# Altium PCB HLK-7621-ALL-KIT-V2.2.PcbDoc (part 2 of 2)
Units mm, origin at the board's own origin, x right, y up, seen from the top; angles counter-clockwise.
Board outline 140 x 100 mm, 2 copper layers (Top Layer, Bottom Layer); 118 components, 240 nets, 722 pads, 584 vias.
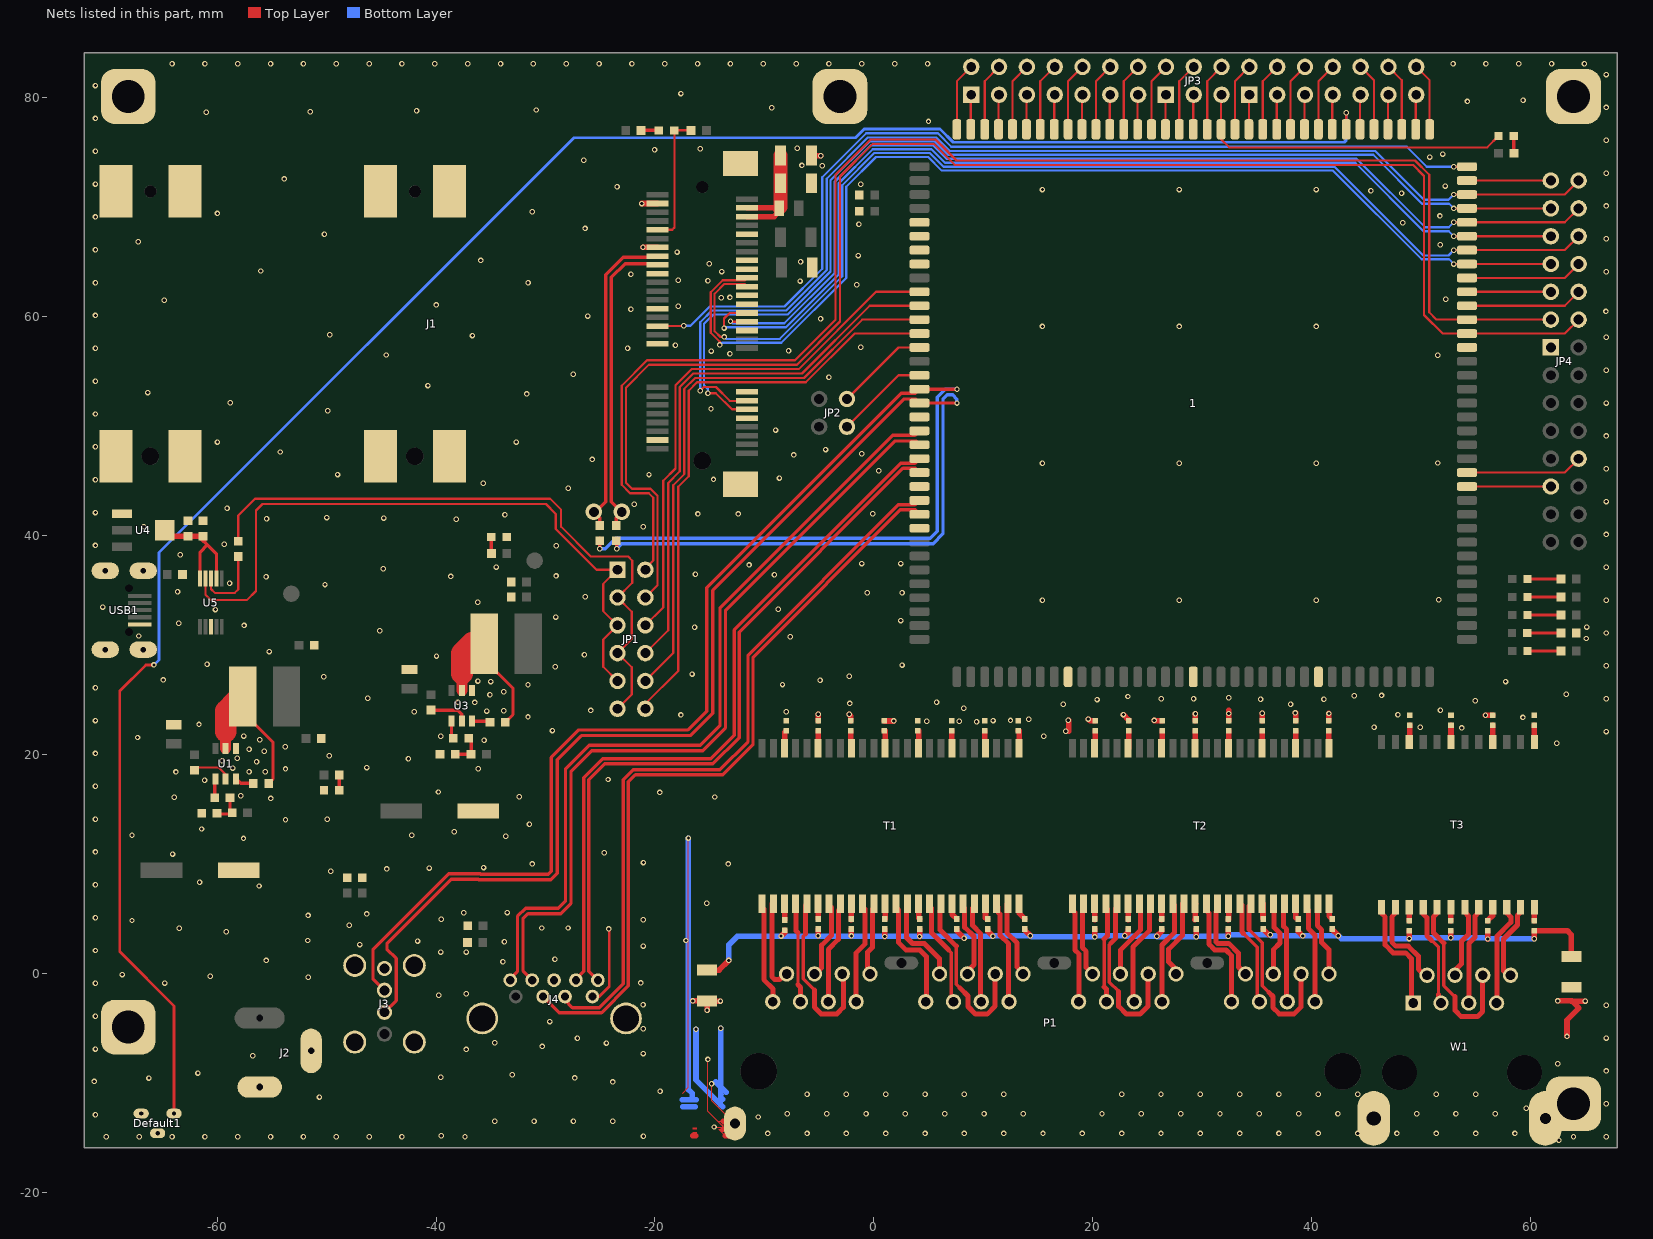
[diagram p2: the nets of this part, all layers, seen from the top]

## Via types
v1: diameter 0.5, hole 0.3, Top Layer to Bottom Layer, tented both sides, 582 vias
v2: diameter 1.5, hole 0.9, Top Layer to Bottom Layer, tented both sides, 2 vias

## Nets (pads, with @x,y where several pads share a name; then routed paths per layer and width w, separated by ;. In a path a pad name is that pad's centre, name@x,y a point inside that pad or via, vN(x,y) a via of type N, cw(c..) or ccw(c..) an arc to the next point about the centre after c; other vN are vias at no path point) (continued)
GND: 1.5 1.6 1.7 1.8 1.19 1.24 1.27 1.44 1.53 1.62 1.92 1.119 1.125 C4.2 C5.2 C7.2 C9.2 C10.2 C11.2 C12.2 C13.2 C14.2 C15.2 C18.2 C19.2 C20.2 C21.2 C22.2 C23.2 C24.2 C25.2 C26.2 C27.1 C28.1 C29.1 C30.1 C31.1 C32.1 C33.1 C34.1 C35.1 C36.1 C37.1 C38.1 C39.1 C40.1 C41.1 C42.1 C43.1 C44.1 C45.1 C46.1 C47.2 C48.2 C49.1 D6.2 D7.2 Default1.2 Default1.3 J1.4 J1.9 J1.15 J1.18 J1.21 J1.26 J1.27 J1.29 J1.34 J1.35 J1.37 J1.40 J1.43 J1.50 J1.55 J1.56 J1.57 J1.58 J1.59 J1.60 J1.63 J1.64 J1.65 J1.66 J2.2 J2.3 J3.4 J3.5 J3.6 J3.7 J3.8 J4.4 J4.7 J4.10 J4.11 JP3.15 JP3.21 JP4.13 pad.1@63.892,80.135 pad.1@63.892,-11.865 pad.1@-3.108,80.135 pad.1@-68.108,80.135 pad.1@-68.108,-4.865 pad.@-12.698,-13.667 R4.1 R11.1 R46.1 U1.1 U3.1 U4.1 U5.3 USB1.5 USB1.6 USB1.7 USB1.8 USB1.9 W1. W1.10 | length 126.3
  Top Layer w0.102: -17.482,-10.889 -16.942,-10.349 v1(-16.942,12.405) ; -16.563,-14.472 -16.163,-14.472 -16.163,-14.666 -16.279,-14.782 ; -16.563,-14.145 -16.163,-14.145 ; -16.563,-14.072 -16.163,-14.072 ; v1(-15.161,-7.813) -15.161,-12.563 pad.@-12.885,-14.84 ; v1(-14.834,-10.033) -14.834,-11.568 pad.@-12.938,-13.464 ; v1(-14.603,-13.985) -13.124,-13.985 pad.@-12.924,-14.185 ; -14.163,-13.464 -13.763,-13.464 -13.763,-14.185 ; -13.576,-14.771 -14.163,-14.185 ; -14.163,-14.185 -13.763,-14.185 ; -14.163,-14.185 -13.763,-14.185
  Top Layer w0.203: 1.125@26.622,77.135 26.622,80.254 JP3.15@26.667,80.3 ; 1.119@34.242,77.135 34.242,80.254 JP3.21@34.287,80.3
  Top Layer w0.254: J4.4@-25.718,-2.073 -25.091,-2.073 -24.178,-1.16 -24.178,4.066 v1(-24.216,4.103)
  Top Layer w0.508: v1(-21.221,70.361) -21.168,70.361 -21.166,70.362 J1.50@-19.783,70.362 ; v1(-21.094,66.373) -19.783,66.373 J1.40@-19.783,66.362 ; -16.563,-14.782 -16.279,-14.782 ; v1(-16.547,-2.468) C23.2@-15.312,-2.468 ; v1(-15.243,-3.32) C23.2@-15.243,-2.485 ; v1(-14.019,-2.485) C23.2@-15.243,-2.485 ; -13.763,-14.185 pad.@-12.924,-14.185 ; -13.763,-13.464 pad.@-12.938,-13.464 ; -13.576,-14.771 pad.@-12.953,-14.771 ; C25.2@-5.724,74.755 -5.724,74.729 v1(-4.863,74.729) ; C28.1@-5.08,23.122 v1(-5.08,23.707) ; v1(-2.257,23.701) -2.108,23.552 C29.1@-2.108,23.122 ; C30.1@0.94,23.122 0.964,23.099 v1(1.806,23.099) ; 17.806,22.149 v1@17.806,23.18 ; v1(19.583,23.275) 19.736,23.122 C35.1@20.218,23.122 ; v1(22.784,23.681) 22.787,23.684 23.266,23.204 C36.1@23.266,23.122 ; v1(25.603,23.148) 25.603,23.122 C37.1@26.314,23.122 ; C38.1@29.362,23.122 v1(29.362,23.757) ; C39.1@32.41,23.122 v1(32.41,23.783) 32.41,24.061 ; C40.1@35.458,23.122 v1(35.458,23.808) ; v1(38.481,23.834) 38.506,23.834 C41.1@38.506,23.122 ; C42.1@41.554,23.122 v1(41.554,23.783) ; v1(55.855,23.63) C45.1@56.515,23.63 ; v1(62.441,-2.468) 63.675,-2.468 ; v1(63.297,-5.715) 63.297,-4.221 64.389,-3.129 63.745,-2.485 ; v1(64.968,-2.485) 63.745,-2.485 ; C23.2@-15.312,-2.468 -15.312,-2.46 C23.2@-15.243,-2.46 C23.2@-15.243,-2.485 ; C23.2@-15.312,-2.468 -15.312,-2.485 C23.2@-15.243,-2.485 ; 63.675,-2.468 63.675,-2.485 63.745,-2.485 ; 63.675,-2.468 63.675,-2.46 63.745,-2.46 63.745,-2.485
  Bottom Layer w0.102: -16.615,-11.496 -16.22,-11.515 ; -14.215,-12.121 -13.815,-12.121 -13.815,-11.496 -13.815,-11.446 ; -14.215,-11.446 -13.815,-11.446 ; -13.508,-10.801 -13.815,-11.107 -13.815,-11.446
  Bottom Layer w0.508: -17.514,-11.515 -16.22,-11.515 ; -17.482,-12.152 -16.336,-12.152 ; v1(-16.942,12.405) -16.942,-10.569 -16.615,-10.896 -16.615,-11.496 ; v1(-16.254,-5.07) -16.254,-9.682 -13.815,-12.121 ; -14.45,-9.858 -13.508,-10.801 ; v1(-13.993,-4.968) -13.993,-11.268 -13.815,-11.446
  other v1: 62.563,-15.204 -70.108,-14.865 -67.108,-14.865 -64.108,-14.865 -61.108,-14.865 -58.108,-14.865 -55.108,-14.865 -52.108,-14.865 -49.108,-14.865 -46.108,-14.865 -43.108,-14.865 -37.353,-14.871 63.892,-14.865 66.892,-14.865 -21.051,-14.834 -39.521,-14.796 -9.705,-14.576 -6.113,-14.576 -2.521,-14.576 1.071,-14.576 4.663,-14.576 8.256,-14.576 11.848,-14.576 15.44,-14.576 19.032,-14.576 22.624,-14.576 26.216,-14.576 29.808,-14.576 33.4,-14.576 36.992,-14.576 40.584,-14.576 44.177,-14.576 47.769,-14.576 51.361,-14.576 54.953,-14.576 58.545,-14.576 -34.636,-13.463 -31.044,-13.463 -27.452,-13.463 -23.86,-13.463 -10.569,-13.071 -71.108,-12.865 -7.909,-12.78 -4.317,-12.78 -0.725,-12.78 2.867,-12.78 6.459,-12.78 10.052,-12.78 13.644,-12.78 20.828,-12.78 24.42,-12.78 28.012,-12.78 31.604,-12.78 35.196,-12.78 38.788,-12.78 42.381,-12.78 49.565,-12.78 53.157,-12.78 56.749,-12.78 59.565,-12.283 66.892,-11.865 -50.648,-11.252 -6.113,-10.984 -2.521,-10.984 1.071,-10.984 4.663,-10.984 8.256,-10.984 11.848,-10.984 22.624,-10.984 26.216,-10.984 29.808,-10.984 33.4,-10.984 36.992,-10.984 40.584,-10.984 44.177,-10.984 51.361,-10.984 54.953,-10.984 -19.533,-10.719 -23.86,-9.871 -71.219,-9.82 -66.215,-9.515 -27.33,-9.5 -39.555,-9.439 -33.045,-9.22 -61.745,-9.058 66.892,-8.865 62.459,-8.204 -56.741,-7.483 -21.078,-7.281 -37.247,-6.899 -71.108,-6.865 -30.302,-6.629 -24.437,-6.314 -34.636,-6.279 -27.079,-5.883 66.892,-5.865 -21.078,-5 -29.619,-4.359 -71.108,-3.865 66.892,-2.865 -21.088,-2.831 -39.754,-1.946 -37.247,-1.819 -71.108,-0.865 -64.77,-0.838 -21.288,-0.828 -51.664,-0.305 -60.627,-0.218 -68.654,-0.066 -33.886,1.102 -55.497,1.229 -29.134,1.329 -39.555,1.991 -37.247,1.991 -71.108,2.135 -21.065,2.543 -46.962,2.677 -33.754,2.931 -41.681,2.997 -51.714,3.048 -17.177,3.048 -59.157,3.861 -63.449,4.166 -30.353,4.191 -27.94,4.191 -47.93,4.445 -67.767,4.877 -21.078,4.946 -39.521,4.983 -71.108,5.135 -51.689,5.334 -46.327,5.471 -37.465,5.588 -33.5,5.598 -15.28,6.452 -56.159,8.026 -71.108,8.135 -61.595,8.357 -49.604,9.383 -44.498,9.586 -40.612,9.662 -35.659,9.713 -31.218,10.043 -13.307,10.043 -21.054,10.17 -64.059,10.947 -24.638,11.074 -71.108,11.135 -57.582,12.37 -33.63,12.573 -67.767,12.649 -42.215,12.649 -38.329,12.979 -61.417,13.233 -31.471,13.665 -53.746,14.072 -71.108,14.135 -49.936,14.122 -55.093,16.027 -63.906,16.129 -14.529,16.154 -32.385,16.18 -57.836,16.281 -19.558,16.571 -39.776,16.612 -71.108,17.135 -61.138,17.678 -24.282,17.755 -63.754,18.44 -57.074,18.466 -55.601,18.466 -53.746,18.72 -36.144,18.745 -58.572,18.796 -46.33,18.847 -56.388,19.38 -59.538,19.456 -42.52,19.66 -58.166,19.685 -49.759,19.914 -71.108,20.135 -55.677,20.345 -57.074,20.523 -53.772,20.752 62.351,21.076 -35.611,21.336 -56.109,21.387 -67.259,21.59 -39.573,21.692 -57.556,21.717 15.51,21.714 66.892,22.135 17.528,22.159 -29.362,22.225 53.693,22.464 45.672,22.515 49.883,22.515 -61.646,22.784 9.373,23.038 4.828,23.073 7.8,23.073 -71.108,23.135 10.874,23.135 12.471,23.148 17.75,23.178 14.125,23.251 59.273,23.421 -31.598,23.47 -17.628,23.647 47.856,23.658 -8.004,23.937 -41.986,23.952 -35.357,24.003 -33.807,24.028 -25.855,24.064 51.742,24.089 8.202,24.257 17.3,24.623 38.052,24.623 -2.207,24.699 -37.998,24.79 -36.449,24.79 5.715,24.816 54.917,24.953 20.373,25.055 35.308,25.08 41.1,25.08 26.241,25.131 29.187,25.131 66.892,25.135 -46.228,25.171 32.413,25.232 23.193,25.334 43.868,25.41 46.357,25.436 -35.077,25.502 63.221,25.552 -33.807,25.756 -71.108,26.135 -31.598,26.416 -8.354,26.426 -35.001,26.695 57.683,26.695 -36.17,26.746 -4.925,26.807 -64.922,26.848 -50.241,27.127 -2.258,27.188 -16.612,27.381 -29.108,28.042 66.892,28.135 2.568,28.204 -60.909,28.27 -39.954,29.032 -26.441,29.159 -55.22,29.439 65.049,30.632 -7.645,30.785 -67.16,30.861 66.892,31.135 -45.136,31.344 -16.383,31.648 65.1,31.674 -57.531,31.826 -63.5,32.029 2.441,32.268 -29.058,32.588 -60.147,33.274 -8.738,33.31 -70.434,33.503 -36.195,33.934 15.392,34.135 27.892,34.135 40.392,34.135 66.892,34.135 51.587,34.163 -26.365,34.442 -0.607,34.808 2.568,34.808 -63.602,34.9 -50.14,35.56 -58.852,35.687 -55.524,36.271 -38.659,36.297 -29.032,36.347 -9.093,36.449 -16.307,36.5 -44.831,37.008 66.892,37.135 -34.493,37.16 -11.405,37.351 -1.115,37.475 2.441,37.475 -63.348,38.278 -29.007,39.091 -71.108,39.135 -59.334,39.243 66.892,40.135 -66.673,40.828 -21.082,40.843 -38.151,41.529 -55.474,41.58 -44.78,41.631 -49.987,41.681 -33.706,41.935 -16.078,42.012 -12.395,42.012 -0.102,42.037 -71.108,42.135 -59.08,42.52 -21.895,42.901 66.892,43.135 -27.915,44.348 -35.685,44.816 -71.108,45.135 -14.656,45.161 -8.636,45.288 -48.994,45.603 -20.546,45.603 0.432,45.949 66.892,46.135 15.392,46.635 27.892,46.635 40.392,46.635 51.486,46.66 -25.73,46.99 -7.315,47.396 -1.115,47.508 -54.227,47.666 -4.417,47.889 -71.108,48.135 -59.967,48.575 -32.662,48.575 66.892,49.135 -8.989,49.667 -71.108,51.135 -49.883,51.445 -14.884,51.613 -58.799,52.156 66.892,52.135 -31.722,52.969 -66.318,53.096 -40.739,53.731 -71.108,54.135 -4.115,54.483 -27.457,54.762 66.892,55.135 51.486,56.49 -44.549,56.525 -13.155,56.652 -14.857,56.881 -7.798,56.921 -71.108,57.135 -22.504,57.15 -1.194,57.226 -18.133,57.414 66.892,58.135 -36.675,58.303 -49.705,58.379 15.392,59.135 27.892,59.135 40.392,59.135 -4.877,59.842 -26.134,60.081 -71.108,60.135 66.853,60.503 -22.197,60.716 -17.879,60.97 -39.977,61.097 -64.818,61.529 52.225,61.605 -13.942,61.758 -13.155,61.783 -1.575,62.941 -31.595,63.129 -71.108,63.135 -6.754,63.282 -15.161,63.307 -17.879,63.358 -22.197,63.891 -13.891,64.145 66.892,64.135 -56.005,64.196 -15.034,64.856 -6.703,65.034 -35.913,65.161 -1.448,65.608 -17.981,65.923 -71.108,66.135 51.717,66.584 -67.206,66.863 66.892,67.135 -50.188,67.549 -26.388,68.082 -1.372,68.478 48.288,68.616 -71.108,69.135 51.691,69.225 -59.967,69.454 -31.214,69.606 66.892,70.135 48.184,71.298 45.39,71.526 15.392,71.635 27.892,71.635 40.392,71.635 -23.467,71.892 52.172,71.958 -1.194,72.111 -71.108,72.135 -53.871,72.603 66.892,73.135 -4.722,73.823 -6.579,73.838 -26.515,74.305 50.775,74.6 51.941,74.879 -71.108,75.135 -20.038,75.27 -15.873,75.372 -7.01,75.413 66.892,76.135 4.981,77.861 -71.108,78.135 -60.983,78.699 -51.483,78.75 -41.777,78.826 -30.833,78.903 -9.345,79.106 66.892,79.135 54.204,79.68 59.284,79.781 -17.625,80.401 -71.108,81.135 66.892,82.135 -64.108,83.135 -61.108,83.135 -58.108,83.135 -55.108,83.135 -52.108,83.135 -49.108,83.135 -46.108,83.135 -43.108,83.135 -40.108,83.135 -37.108,83.135 -34.108,83.135 -31.108,83.135 -28.108,83.135 -25.108,83.135 -22.108,83.135 -19.108,83.135 -16.108,83.135 -13.108,83.135 -10.108,83.135 -7.108,83.135 -4.108,83.135 -1.108,83.135 1.892,83.135 4.892,83.135 52.892,83.135 55.892,83.135 58.892,83.135 61.892,83.135 64.892,83.135
GPIO0: 1.104 JP4.1 | length 7.7
  Top Layer w0.203: 1.104@54.162,72.455 JP4.1@61.821,72.455
I2C_SCLK: 1.96 JP4.9 | length 7.7
  Top Layer w0.203: 1.96@54.162,62.295 JP4.9@61.821,62.295
I2C_SD: 1.97 JP4.8 | length 10.7
  Top Layer w0.203: 1.97@54.162,63.565 63.091,63.565 JP4.8@64.361,64.835
JTCLK: 1.124 JP3.18 | length 6.2
  Top Layer w0.203: 1.124@27.892,77.135 27.892,81.524 JP3.18@29.207,82.84
JTDI: 1.122 JP3.20 | length 6.2
  Top Layer w0.203: 1.122@30.432,77.135 30.432,81.524 JP3.20@31.747,82.84
JTDO: 1.121 D9.2 JP3.19 | length 30.2
  Top Layer w0.203: JP3.19@31.747,80.3 31.702,80.254 1.121@31.702,77.135 31.702,76.243 32.456,75.489 56.007,75.489 D9.2@57.048,76.53
JTMS: 1.120 JP3.22 | length 6.2
  Top Layer w0.203: 1.120@32.972,77.135 32.972,81.524 JP3.22@34.287,82.84
JTRST_N: 1.123 JP3.17 | length 3.2
  Top Layer w0.203: 1.123@29.162,77.135 29.162,80.254 JP3.17@29.207,80.3
LDO-3.3V: C4.1 C7.1 U4.0 U5.7 U5.10 | length 11.1
  Top Layer w0.3: U5.10@-61.554,36.109 -61.554,38.511 -60.878,39.187 ; -61.112,39.421 -60.054,38.362 U5.7@-60.054,36.109
  Top Layer w0.5: U4.0@-64.788,40.517 -64.25,39.98 -61.57,39.98 C7.1@-61.214,39.624
LED_WLAN_SOCKET: D8.1 J1.44 R16.2 | length 12.2
  Top Layer w0.203: J1.44@-19.783,67.962 -18.425,67.962 -18.214,68.173 -18.214,76.943 D8.1@-18.312,77.041
  Top Layer w0.254: D8.1@-18.312,77.041 -18.304,77.048 R16.2@-16.702,77.048
MDC: 1.83 JP4.22 | length 10.7
  Top Layer w0.203: 1.83@54.162,45.785 63.091,45.785 JP4.22@64.361,47.055
MDIO: 1.82 JP4.23 | length 7.7
  Top Layer w0.203: 1.82@54.162,44.515 JP4.23@61.821,44.515
ND_ALE: 1.138 JP3.4 | length 6.2
  Top Layer w0.203: 1.138@10.112,77.135 10.112,81.524 JP3.4@11.427,82.84
ND_CLE: 1.137 JP3.3 | length 3
  Top Layer w0.203: 1.137@11.382,77.135 11.382,80.025 JP3.3@11.427,80.071
ND_CS_N: 1.136 JP3.6 | length 6.2
  Top Layer w0.203: 1.136@12.652,77.135 12.652,81.524 JP3.6@13.967,82.84
ND_D0: 1.133 JP3.7 | length 3.2
  Top Layer w0.203: 1.133@16.462,77.135 16.462,80.254 JP3.7@16.507,80.3
ND_D1: 1.132 JP3.10 | length 6.2
  Top Layer w0.203: 1.132@17.732,77.135 17.732,81.524 JP3.10@19.047,82.84
ND_D2: 1.131 JP3.9 | length 3.2
  Top Layer w0.203: 1.131@19.002,77.135 19.002,80.254 JP3.9@19.047,80.3
ND_D3: 1.130 JP3.12 | length 6.2
  Top Layer w0.203: 1.130@20.272,77.135 20.272,81.524 JP3.12@21.587,82.84
ND_D4: 1.129 JP3.11 | length 3.2
  Top Layer w0.203: 1.129@21.542,77.135 21.542,80.254 JP3.11@21.587,80.3
ND_D5: 1.128 JP3.14 | length 6.2
  Top Layer w0.203: 1.128@22.812,77.135 22.812,81.524 JP3.14@24.127,82.84
ND_D6: 1.127 JP3.13 | length 3.2
  Top Layer w0.203: 1.127@24.082,77.135 24.082,80.254 JP3.13@24.127,80.3
ND_D7: 1.126 JP3.16 | length 6.2
  Top Layer w0.203: 1.126@25.352,77.135 25.352,81.524 JP3.16@26.667,82.84
ND_RB_N: 1.134 JP3.8 | length 6.2
  Top Layer w0.203: 1.134@15.192,77.135 15.192,81.524 JP3.8@16.507,82.84
ND_RE_N: 1.135 JP3.5 | length 3.2
  Top Layer w0.203: 1.135@13.922,77.135 13.922,80.254 JP3.5@13.967,80.3
ND_WE_N: 1.139 JP3.1 | length 3.2
  Top Layer w0.203: 1.139@8.842,77.135 8.842,80.254 JP3.1@8.887,80.3
ND_WP: 1.140 JP3.2 | length 6.2
  Top Layer w0.203: 1.140@7.572,77.135 7.572,81.524 JP3.2@8.887,82.84
NetC8_1: C8.1 L1.1 U1.2 | length 13.9
  Top Layer w0.3: L1.1@-57.651,25.324 -57.651,23.92 -54.889,21.158 -54.889,17.791 C8.1@-55.282,17.399
  Top Layer w1: U1.2@-59.207,20.602 -59.207,22.149
  Top Layer w2: -59.207,22.149 -59.207,24.003 L1.1@-58.286,24.924
NetC8_2: C8.2 U1.6 | length 1.7
  Top Layer w0.3: U1.6@-58.257,17.802 -57.854,17.399 C8.2@-56.682,17.399
NetC17_1: C17.1 L2.1 U3.2 | length 13.2
  Top Layer w0.3: L2.1@-35.579,30.15 -35.579,28.695 -32.969,26.086 -32.969,23.684 C17.1@-33.666,22.987
  Top Layer w1: U3.2@-37.643,25.886 -37.643,27.432
  Top Layer w2: -37.643,27.432 -37.643,29.286 L2.1@-36.722,30.207
NetC17_2: C17.2 U3.6 | length 1.7
  Top Layer w0.3: U3.6@-36.693,23.086 -35.165,23.086 C17.2@-35.066,22.987
NetC23_1: C23.1 C47.1 R19.1 R20.1 R21.1 R22.1 R23.1 R24.1 R25.1 R26.1 R27.1 R28.1 R29.1 R30.1 R31.1 R32.1 R33.1 R34.1 R35.1 R36.1 R37.1 R38.1 | length 98.8
  Top Layer w0.508: C23.1@-15.243,0.34 -14.15,0.34 v1(-13.261,1.229) ; v1(-8.484,3.454) -8.466,3.454 -8.166,3.754 R19.1@-8.166,4.005 ; v1(-5.108,3.49) R20.1@-5.108,4.1 ; v1(-2.06,3.465) R21.1@-2.06,4.1 ; v1(0.988,3.414) R22.1@0.988,4.1 ; v1(4.163,3.415) R23.1@4.163,4.1 ; R24.1@7.567,4.1 7.567,3.922 v1(8.227,3.261) ; R25.1@10.411,4.1 10.411,3.896 v1(10.869,3.439) ; R26.1@13.79,4.1 13.79,3.973 v1(14.272,3.49) ; v1(20.175,3.373) R27.1@20.175,4.1 ; v1(22.908,3.49) 23.223,3.805 R28.1@23.223,4.1 ; v1(25.829,3.439) 26.271,3.881 R29.1@26.271,4.1 ; v1(29.446,3.399) R30.1@29.446,4.1 ; v1(32.36,3.429) 32.36,4.092 R31.1@32.367,4.1 ; R32.1@35.542,4.1 36.076,3.566 v1(36.195,3.566) ; R33.1@38.758,4.1 38.758,3.857 v1(39.151,3.465) ; R34.1@41.857,4.1 41.857,4.049 v1(42.415,3.49) ; v1(48.877,3.222) R35.1@48.877,3.947 ; v1(52.687,3.302) R36.1@52.687,3.947 ; v1(56.055,3.185) R37.1@56.055,3.947 ; v1(60.307,3.219) R38.1@60.307,3.947 63.32,3.947 63.675,3.592 C47.1@63.675,1.578
  Bottom Layer w0.508: v1(-13.261,1.229) -13.261,2.647 -12.469,3.439 -8.634,3.439 -5.108,3.439 -2.06,3.439 0.988,3.439 4.163,3.439 8.227,3.439 v1(10.869,3.439) 10.919,3.49 v1(14.272,3.49) 14.389,3.373 v1(20.175,3.373) 20.292,3.49 v1(22.908,3.49) 22.959,3.439 v1(25.829,3.439) 25.87,3.399 v1(29.446,3.399) 29.477,3.429 v1(32.36,3.429) 32.497,3.566 v1(36.195,3.566) 36.297,3.465 v1(39.151,3.465) 39.176,3.49 v1(42.415,3.49) 42.683,3.222 v1(48.877,3.222) 48.957,3.302 v1(52.687,3.302) 55.939,3.302 v1(56.055,3.185) 56.089,3.219 v1(60.307,3.219)
NetC27_2: C27.2 T1.22 | length 2.6
  Top Layer w0.508: C27.2@-8.018,22.208 -8.166,22.06 -8.166,21.56 ; -8.166,21.56 T1.22@-8.166,20.613 -8.166,21.56
NetC28_2: C28.2 T1.19 | length 1.6
  Top Layer w0.508: T1.19@-5.106,20.613 -5.08,20.613 C28.2@-5.08,22.208
NetC29_2: C29.2 T1.16 | length 1.7
  Top Layer w0.508: C29.2@-2.108,22.208 -2.108,20.613 T1.16@-2.046,20.613
NetC30_2: C30.2 T1.13 | length 1.7
  Top Layer w0.508: C30.2@0.94,22.208 1.014,22.208 T1.13@1.014,20.613
NetC31_2: C31.2 T1.10 | length 1.7
  Top Layer w0.508: C31.2@3.988,22.208 4.074,22.208 T1.10@4.074,20.613
NetC32_2: C32.2 T1.7 | length 1.6
  Top Layer w0.508: C32.2@7.087,22.208 7.087,20.613 T1.7@7.134,20.613
NetC33_2: C33.2 T1.4 | length 1.7
  Top Layer w0.508: C33.2@10.135,22.208 10.135,20.613 T1.4@10.194,20.613
NetC34_2: C34.2 T1.1 | length 1.7
  Top Layer w0.508: C34.2@13.183,22.208 13.254,22.208 T1.1@13.254,20.613
NetC35_2: C35.2 T2.22 | length 1.7
  Top Layer w0.508: T2.22@20.155,20.613 20.218,20.613 C35.2@20.218,22.208
NetC36_2: C36.2 T2.19 | length 1.6
  Top Layer w0.508: T2.19@23.215,20.613 23.266,20.613 C36.2@23.266,22.208
NetC37_2: C37.2 T2.16 | length 1.6
  Top Layer w0.508: T2.16@26.275,20.613 26.314,20.613 C37.2@26.314,22.208
NetC38_2: C38.2 T2.13 | length 1.6
  Top Layer w0.508: T2.13@29.335,20.613 29.362,20.613 C38.2@29.362,22.208
NetC39_2: C39.2 T2.10 | length 1.6
  Top Layer w0.508: T2.10@32.395,20.613 32.41,20.613 C39.2@32.41,22.208
NetC40_2: C40.2 T2.7 | length 1.6
  Top Layer w0.508: T2.7@35.455,20.613 35.458,20.613 C40.2@35.458,22.208
NetC41_2: C41.2 T2.4 | length 1.6
  Top Layer w0.508: C41.2@38.506,22.208 38.506,20.613 T2.4@38.515,20.613
NetC42_2: C42.2 T2.1 | length 1.6
  Top Layer w0.508: C42.2@41.554,22.208 41.554,20.613 T2.1@41.575,20.613
NetC43_2: C43.2 T3.10 | length 1.6
  Top Layer w0.508: T3.10@48.895,21.19 48.92,21.19 C43.2@48.92,22.716
NetC44_2: C44.2 T3.7 | length 1.5
  Top Layer w0.508: T3.7@52.705,21.19 C44.2@52.705,22.716
NetC45_2: C45.2 T3.4 | length 1.5
  Top Layer w0.508: T3.4@56.515,21.19 C45.2@56.515,22.716
NetC46_2: C46.2 T3.1 | length 1.5
  Top Layer w0.508: T3.1@60.325,21.19 C46.2@60.325,22.716
NetD0_1: D0.1 R43.2 | length 3.1
  Top Layer w0.3: D0.1@59.69,36.068 R43.2@62.749,36.068
NetD1_1: D1.1 R44.2 | length 3.1
  Top Layer w0.3: D1.1@59.69,34.423 R44.2@62.749,34.423
NetD2_1: D2.1 R45.2 | length 3.1
  Top Layer w0.3: D2.1@59.69,32.779 R45.2@62.749,32.779
NetD3_2: D3.2 R46.2 | length 3.1
  Top Layer w0.3: D3.2@59.665,31.134 R46.2@62.749,31.134
NetD4_1: D4.1 R47.2 | length 3.1
  Top Layer w0.3: D4.1@59.69,29.489 R47.2@62.749,29.489
NetD6_1: D6.1 R41.2 | length 1.5
  Top Layer w0.305: D6.1@-34.94,39.901 -34.94,38.417 R41.2@-34.928,38.405
NetD7_1: D7.1 R42.2 | length 1.4
  Top Layer w0.3: D7.1@-48.832,16.766 -48.83,16.768 R42.2@-48.83,18.161
NetD8_2: D8.2 R15.1 | length 1.5
  Top Layer w0.305: R15.1@-21.271,77.041 -20.462,77.041 D8.2@-19.812,77.041
NetD9_1: D9.1 R40.2 | length 1.6
  Top Layer w0.3: R40.2@58.445,74.955 D9.1@58.445,76.53
NetJ1_36: J1.36 R48.1 | length 28
  Top Layer w0.305: R48.1@-23.546,40.984 -23.546,41.681 v2(-23.038,42.189) -23.981,43.132 -23.981,43.361 -23.981,63.624 -22.733,64.872 -19.893,64.872 J1.36@-19.783,64.762
NetJ1_38: J1.38 R49.1 | length 29
  Top Layer w0.305: R49.1@-25.044,40.984 -25.044,41.656 v2(-25.578,42.189) -25.425,42.189 -24.486,43.129 -24.486,63.856 -22.885,65.456 -19.89,65.456 J1.38@-19.783,65.562
NetP1_1: P1.1 T1.25 | length 9
  Top Layer w0.457: T1.25@-10.16,6.011 -10.058,5.91 -10.058,-0.526 -9.204,-1.38 -9.204,-2.54 P1.1@-9.246,-2.54
NetP1_2: P1.2 T1.26 | length 8.4
  Top Layer w0.457: T1.26@-9.322,6.413 -9.322,-0.254 -9.068,-0.508 -8.625,-0.508 -8.046,0.071 P1.2@-7.976,0
NetP1_3: P1.3 T1.28 | length 8.9
  Top Layer w0.305: -6.937,-0.992 -6.937,3.754
  Top Layer w0.457: T1.28@-7.108,6.198 -7.108,3.926 -6.937,3.754 ; -6.937,-0.992 -6.706,-1.223 P1.3@-6.706,-2.54
NetP1_4: P1.4 T1.31 | length 6.9
  Top Layer w0.457: P1.4@-5.436,-0.019 P1.4@-5.436,0 -5.322,0 -4.775,0.547 -4.775,2.626 -3.886,3.515 -3.886,6.071 T1.31@-3.988,6.172
NetP1_5: P1.5 T1.32 | length 8.9
  Top Layer w0.457: P1.5@-4.166,-2.54 -4.166,2.235 -3.251,3.15 -3.251,5.786 T1.32@-3.144,5.893
NetP1_6: P1.6 T1.29 | length 16.3
  Top Layer w0.305: -6.248,3.645 -6.452,3.442 -6.452,-0.45 -5.433,-1.468
  Top Layer w0.457: -6.248,3.645 -6.248,6.26 T1.29@-6.096,6.413 ; -5.433,-1.468 -5.433,-3.044 -4.83,-3.647 -3.382,-3.647 -2.797,-3.062 -2.797,0 P1.6@-2.896,0
NetP1_7: P1.7 T1.34 | length 9.1
  Top Layer w0.457: P1.7@-1.626,-2.54 -1.631,-2.534 -1.631,1.925 -0.838,2.718 -0.838,5.934 T1.34@-1.026,6.121
NetP1_8: P1.8 T1.35 | length 6.2
  Top Layer w0.457: P1.8@-0.356,0 -0.584,0.229 -0.584,1.981 -0.152,2.413 T1.35@-0.152,5.944
NetP1_9: P1.9 T1.37 | length 10.5
  Top Layer w0.457: T1.37@2.064,6.027 2.261,5.831 2.261,2.857 2.949,2.169 4.2,2.169 4.804,1.565 4.804,-2.54 P1.9@4.724,-2.54
NetP1_10: P1.10 T1.38 | length 7.7
  Top Layer w0.457: T1.38@2.972,5.766 2.972,3.327 3.52,2.779 4.6,2.779 5.994,1.384 P1.10@5.994,0
NetP1_11: P1.11 T1.40 | length 9.4
  Top Layer w0.305: 6.82,2.184 7.064,1.941 7.064,-2.339 P1.11@7.264,-2.54
  Top Layer w0.457: T1.40@5.258,6.027 5.258,3.746 6.82,2.184
NetP1_12: P1.12 T1.43 | length 7
  Top Layer w0.457: T1.43@8.292,5.994 8.292,4.256 9.141,3.406 9.141,0.848 8.534,0.241 P1.12@8.534,0 P1.12@8.928,0
NetP1_13: P1.13 T1.44 | length 8.9
  Top Layer w0.457: T1.44@8.992,6.011 8.992,4.431 9.751,3.671 9.751,-2.487 P1.13@9.804,-2.54
NetP1_14: P1.14 T1.41 | length 15.8
  Top Layer w0.305: 7.521,2.525 7.521,-0.96 7.871,-1.311
  Top Layer w0.457: T1.41@6.045,5.766 6.045,4 7.521,2.525 ; 7.871,-1.311 8.588,-2.027 8.588,-2.987 9.273,-3.673 10.34,-3.673 11.074,-2.939 P1.14@11.074,0
NetP1_15: P1.15 T1.46 | length 9.1
  Top Layer w0.457: T1.46@11.328,6.116 11.328,5.637 11.506,5.46 11.506,3.541 12.307,2.74 12.307,0.939 12.307,-2.502 P1.15@12.344,-2.54
NetP1_16: P1.16 T1.47 | length 7
  Top Layer w0.457: T1.47@12.141,6.387 12.141,3.768 13.081,2.828 13.081,0.618 13.657,0.042 P1.16@13.614,0
NetP1_17: P1.17 T2.25 | length 9.3
  Top Layer w0.457: T2.25@18.11,6.413 18.212,6.311 18.212,5.74 18.364,5.588 18.364,2.172 18.736,1.8 18.736,-2.54 P1.17@18.694,-2.54
NetP1_18: P1.18 T2.26 | length 6.3
  Top Layer w0.457: T2.26@19.074,5.893 19.047,5.867 19.047,2.398 19.383,2.063 19.383,0.582 P1.18@19.964,0
NetP1_19: P1.19 T2.28 | length 8.7
  Top Layer w0.305: 21.025,-1.184 21.025,3.194
  Top Layer w0.457: 21.025,-1.184 21.234,-1.393 P1.19@21.234,-2.54 ; 21.025,3.194 21.311,3.48 T2.28@21.311,5.918
NetP1_20: P1.20 T2.31 | length 7.2
  Top Layer w0.457: P1.20@22.685,0.142 22.685,0 P1.20@22.504,0 22.504,2.172 22.685,2.352 24.359,4.026 T2.31@24.359,6.072
NetP1_21: P1.21 T2.32 | length 9.1
  Top Layer w0.457: P1.21@23.774,-2.54 23.65,-2.415 23.65,2.455 25.146,3.951 T2.32@25.146,5.893
NetP1_22: P1.22 T2.29 | length 15.9
  Top Layer w0.305: 21.634,2.804 21.491,2.661 21.491,-0.749 22.349,-1.607
  Top Layer w0.457: 21.634,2.804 22.073,3.243 22.073,5.984 T2.29@22.134,6.045 ; 22.349,-1.607 22.349,-2.962 23.061,-3.673 24.305,-3.673 25.044,-2.934 P1.22@25.044,0
NetP1_23: P1.23 T2.34 | length 9.5
  Top Layer w0.457: P1.23@26.314,-2.54 26.312,-2.537 26.312,2.639 27.432,3.759 27.432,6.276 T2.34@27.295,6.413
NetP1_24: P1.24 T2.35 | length 7.2
  Top Layer w0.457: P1.24@27.584,-0.041 P1.24@27.584,0 27.584,0.419 26.921,1.082 26.921,2.258 28.169,3.505 T2.35@28.169,6.413
NetP1_25: P1.25 T2.37 | length 9.7
  Top Layer w0.457: T2.37@30.48,5.658 30.582,5.556 30.582,2.727 30.935,2.374 31.124,2.184 32.145,2.184 32.664,1.665 P1.25@32.664,-2.54
NetP1_26: P1.26 T2.38 | length 7.4
  Top Layer w0.457: T2.38@31.242,5.658 31.242,2.929 31.377,2.794 32.398,2.794 33.302,1.89 33.302,0.633 P1.26@33.934,0
NetP1_27: P1.27 T2.40 | length 9.9
  Top Layer w0.305: 33.756,3.693 33.756,3.684 34.999,2.441 34.999,-2.334 P1.27@35.204,-2.54
  Top Layer w0.457: T2.40@33.47,6.413 33.604,6.278 33.604,3.845 33.756,3.693 ; P1.27@34.999,-2.54 P1.27@35.204,-2.54
NetP1_28: P1.28 T2.43 | length 6.9
  Top Layer w0.457: P1.28@36.474,0 36.474,2.21 37.081,2.817 37.081,3.711 36.557,4.236 T2.43@36.557,6.413
NetP1_29: P1.29 T2.44 | length 9.1
  Top Layer w0.457: T2.44@37.555,6.413 37.417,6.275 37.417,4.341 37.691,4.067 37.691,-2.487 P1.29@37.744,-2.54
NetP1_30: P1.30 T2.41 | length 16.6
  Top Layer w0.305: 34.265,4.049 35.456,2.858 35.456,-1.082 36.065,-1.692
  Top Layer w0.457: 34.265,4.049 34.265,6.211 T2.41@34.467,6.413 ; 36.065,-1.692 36.446,-2.073 36.446,-3.084 37.01,-3.647 38.382,-3.647 38.986,-3.043 38.986,-0.028 P1.30@39.014,0
NetP1_31: P1.31 T2.46 | length 8.6
  Top Layer w0.457: T2.46@39.675,5.842 39.675,4.14 40.284,3.531 P1.31@40.284,-2.54
NetP1_32: P1.32 T2.47 | length 6
  Top Layer w0.457: T2.47@40.488,5.566 40.488,4.42 40.894,4.013 40.894,2.87 41.554,2.21 P1.32@41.554,0
NetR1_2: R1.2 R2.1 R4.2 | length 3.1
  Top Layer w0.3: R4.2@-60.223,14.594 -58.725,14.594 R1.2@-58.612,14.707 -58.812,14.907 R2.1@-58.812,16.078
NetR2_2: R2.2 U1.4 | length 1.7
  Top Layer w0.3: R2.2@-60.212,16.078 -60.212,17.748 U1.4@-60.157,17.802
NetR6_1: R6.1 U1.5 | length 3.3
  Top Layer w0.2: R6.1@-61.838,18.847 -59.842,18.847 -59.207,18.212 U1.5@-59.207,17.802
NetR9_1: R9.1 R10.2 R11.2 | length 3
  Top Layer w0.3: R11.2@-38.238,20.066 R10.2@-36.793,20.066 -36.793,21.288 R9.1@-37.019,21.514
NetR9_2: R9.2 U3.4 | length 1.6
  Top Layer w0.3: U3.4@-38.593,23.086 -38.593,21.688 R9.2@-38.419,21.514
NetR14_1: R14.1 U3.5 | length 3.6
  Top Layer w0.3: R14.1@-40.462,24.09 -38.01,24.09 -37.643,23.724 U3.5@-37.643,23.086
NetR19_2: R19.2 T1.27 | length 1.5
  Top Layer w0.508: R19.2@-8.166,4.919 T1.27@-8.166,6.413
NetR20_2: R20.2 T1.30 | length 2.9
  Top Layer w0.381: T1.30@-5.207,6.413 T1.30@-5.106,6.413
  Top Layer w0.508: R20.2@-5.108,5.014 R20.2@-5.106,5.016 ; R20.2@-5.106,5.016 T1.30@-5.106,6.413 R20.2@-5.106,5.016
NetR21_2: R21.2 T1.33 | length 1.5
  Top Layer w0.508: R21.2@-2.06,4.963 R21.2@-2.06,5.014 -2.06,6.413 T1.33@-2.046,6.413
NetR22_2: R22.2 T1.36 | length 1.4
  Top Layer w0.102: T1.36@0.98,6.387 T1.36@1.014,6.413
  Top Layer w0.508: R22.2@1.014,5.014 T1.36@1.014,6.413
NetR23_2: R23.2 T1.39 | length 1.4
  Top Layer w0.508: T1.39@4.074,6.413 4.074,5.103 R23.2@4.163,5.014
NetR24_2: R24.2 T1.42 | length 1.6
  Top Layer w0.508: T1.42@7.134,6.413 7.134,5.447 R24.2@7.567,5.014
NetR25_2: R25.2 T1.45 | length 2.8
  Top Layer w0.508: R25.2@10.164,5.122 10.166,5.12 10.166,6.413 T1.45@10.194,6.413 10.194,5.231 R25.2@10.411,5.014
NetR26_2: R26.2 T1.48 | length 1.6
  Top Layer w0.508: T1.48@13.254,6.413 13.254,5.55 R26.2@13.79,5.014
NetR27_2: R27.2 T2.27 | length 1.5
  Top Layer w0.381: T2.27@20.066,6.413 T2.27@20.155,6.413
  Top Layer w0.508: T2.27@20.155,6.413 20.155,4.973 R27.2@20.165,4.963
NetR28_2: R28.2 T2.30 | length 1.5
  Top Layer w0.381: T2.30@23.213,6.413 T2.30@23.215,6.413
  Top Layer w0.508: R28.2@23.213,4.963 T2.30@23.213,6.413
NetR29_2: R29.2 T2.33 | length 1.5
  Top Layer w0.102: T2.33@26.259,6.399 T2.33@26.275,6.413
  Top Layer w0.508: R29.2@26.261,4.963 26.275,4.977 T2.33@26.275,6.413
NetR30_2: R30.2 T2.36 | length 1.6
  Top Layer w0.381: T2.36@29.335,6.413 T2.36@29.464,6.413
  Top Layer w0.508: R30.2@29.309,4.963 29.335,4.989 T2.36@29.335,6.413
NetR31_2: R31.2 T2.39 | length 1.5
  Top Layer w0.102: T2.39@32.367,6.375 T2.39@32.395,6.413
  Top Layer w0.381: T2.39@32.385,6.413 T2.39@32.395,6.413
  Top Layer w0.508: R31.2@32.357,4.963 32.395,5.001 T2.39@32.395,6.413
NetR32_2: R32.2 T2.42 | length 1.4
  Top Layer w0.508: T2.42@35.455,6.413 35.532,6.413 R32.2@35.532,5.09
NetR33_2: R33.2 T2.45 | length 1.6
  Top Layer w0.508: R33.2@38.515,5.116 R33.2@38.515,5.257 ; T2.45@38.515,6.413 R33.2@38.515,5.257 ; R33.2@38.758,5.014 R33.2@38.515,5.257
NetR34_2: R34.2 T2.48 | length 2.7
  Top Layer w0.102: T2.48@41.575,6.413 T2.48@41.679,6.36
  Top Layer w0.508: R34.2@41.857,5.014 41.575,5.296 ; 41.575,5.296 T2.48@41.575,6.413 41.575,5.296
NetR35_2: R35.2 T3.15 | length 1.2
  Top Layer w0.508: R35.2@48.877,4.862 48.877,6.072 T3.15@48.895,6.09
NetR36_2: R36.2 T3.18 | length 1.4
  Top Layer w0.102: R36.2@52.705,4.712 R36.2@52.705,4.862
  Top Layer w0.508: R36.2@52.677,4.836 R36.2@52.695,4.854 ; R36.2@52.687,4.862 52.687,6.072 T3.18@52.705,6.09
NetR37_2: R37.2 T3.21 | length 1.4
  Top Layer w0.508: R37.2@56.055,4.862 56.515,5.321 T3.21@56.515,6.09
NetR38_2: R38.2 T3.24 | length 1.4
  Top Layer w0.102: R38.2@60.325,4.862 60.325,4.772 R38.2@60.368,4.73
  Top Layer w0.508: R38.2@60.297,4.836 R38.2@60.315,4.854 ; R38.2@60.307,4.862 60.307,6.072 T3.24@60.325,6.09
NetR39_1: R39.1 U5.8 | length 6.7
  Top Layer w0.203: U5.8@-60.554,36.109 -60.554,35.154 -60.198,34.798 -58.369,34.798 -58.064,35.103 R39.1@-58.064,38.111
NetT3_13: T3.13 W1.1 | length 10.7
  Top Layer w0.457: T3.13@46.355,6.09 46.355,5.547 46.685,5.217 46.685,2.65 47.409,1.926 48.558,1.926 49.075,1.409 49.075,-2.614 W1.1@49.022,-2.667 ; W1.1@49.092,-2.665 W1.1@49.251,-2.665
NetT3_14: T3.14 W1.2 | length 8.6
  Top Layer w0.457: T3.14@47.625,6.09 47.625,5.547 47.295,5.217 47.295,2.903 47.662,2.535 48.811,2.535 49.736,1.61 49.736,0.429 W1.2@50.292,-0.127 ; W1.2@50.521,-0.125 W1.2@50.777,-0.382
NetT3_16: T3.16 W1.3 | length 9.3
  Top Layer w0.305: 50.928,3.058 51.562,2.424 51.562,-1.905
  Top Layer w0.457: T3.16@50.165,6.09 50.165,5.471 50.495,5.141 50.495,3.491 50.928,3.058 ; W1.3@51.562,-2.667 51.562,-1.905
NetT3_17: T3.17 W1.6 | length 16.7
  Top Layer w0.305: 52.045,2.803 52.045,-1.067 53.061,-2.083
  Top Layer w0.457: T3.17@51.435,6.09 51.435,5.547 51.105,5.217 51.105,3.743 52.045,2.803 ; 53.061,-2.083 53.061,-3.333 53.639,-3.912 55.118,-3.912 55.601,-3.429 55.601,-0.356 W1.6@55.372,-0.127
NetT3_19: T3.19 W1.4 | length 7
  Top Layer w0.457: W1.4@52.832,-0.127 52.832,-0.125 52.832,0.084 53.67,0.922 53.67,2.984 54.305,3.619 54.305,5.293 53.975,5.624 T3.19@53.975,6.09 ; W1.4@53.029,-0.093 W1.4@53.061,-0.125
NetT3_20: T3.20 W1.5 | length 9.2
  Top Layer w0.457: W1.5@54.102,-2.667 54.331,-2.438 54.331,2.783 54.915,3.367 54.915,5.293 55.245,5.624 T3.20@55.245,6.09
NetT3_22: T3.22 W1.7 | length 9.5
  Top Layer w0.457: W1.7@56.642,-2.667 56.896,-2.413 56.896,3.442 58.163,4.709 58.163,5.194 57.785,5.573 T3.22@57.785,6.09
NetT3_23: T3.23 W1.8 | length 7
  Top Layer w0.457: W1.8@57.912,-0.127 57.506,0.279 57.506,3.189 58.773,4.457 58.773,4.962 58.773,5.342 59.055,5.624 T3.23@59.055,6.09
PCIE0_5V: C24.1 C25.1 J1.47 J1.49 R17.1 | length 11.3
  Top Layer w0.508: J1.47@-11.583,69.162 -9.121,69.162 -8.634,69.649 R17.1@-8.634,69.929 -8.634,69.977 -11.569,69.977 J1.49@-11.583,69.962
  Top Layer w1.27: R17.1@-8.634,69.929 -8.524,70.039 C24.1@-8.524,72.215 C25.1@-8.524,74.755
PCIE_CKN0: 1.118 JP3.24 | length 6.2
  Top Layer w0.203: 1.118@35.512,77.135 35.512,81.524 JP3.24@36.827,82.84
PCIE_CKN1: 1.110 JP3.30 | length 6.2
  Top Layer w0.203: JP3.30@44.447,82.84 45.672,81.615 1.110@45.672,77.135
PCIE_CKN2: 1.102 J1.11 JP4.3 | length 102.3
  Top Layer w0.203: v1(-15.164,53.035) -14.439,53.035 -12.966,51.562 J1.11@-11.583,51.562 ; v1(52.959,69.915) 1.102@54.162,69.915 JP4.3@61.821,69.915
  Bottom Layer w0.203: v1(-15.164,53.035) -15.164,53.416 -15.517,53.769 -15.517,54.305 -15.517,54.889 -15.517,59.37 -14.653,60.234 -7.877,60.234 -3.96,64.15 -3.96,72.481 -0.409,76.032 5.545,76.032 6.764,74.813 45.593,74.813 50.063,70.343 52.531,70.343 v1(52.959,69.915)
PCIE_CKP0: 1.117 JP3.23 | length 3.2
  Top Layer w0.203: 1.117@36.782,77.135 36.782,80.254 JP3.23@36.827,80.3
PCIE_CKP1: 1.111 JP3.29 | length 3.2
  Top Layer w0.203: 1.111@44.402,77.135 44.402,80.254 JP3.29@44.447,80.3
PCIE_CKP2: 1.103 J1.13 JP4.2 | length 106.4
  Top Layer w0.203: v1(-15.875,53.264) -15.545,53.594 -14.427,53.594 -13.167,52.334 -11.612,52.334 J1.13@-11.583,52.362 ; v1(52.959,71.185) 1.103@54.162,71.185 63.091,71.185 JP4.2@64.361,72.455
  Bottom Layer w0.203: v1@-15.873,53.264 -15.873,59.517 -14.801,60.589 -8.024,60.589 -4.316,64.297 -4.316,72.629 -0.556,76.388 5.692,76.388 6.911,75.169 45.763,75.169 50.234,70.698 52.472,70.698 v1(52.959,71.185)
PCIE_RXN0: 1.114 JP3.28 | length 6.2
  Top Layer w0.203: 1.114@40.592,77.135 40.592,81.524 JP3.28@41.907,82.84
PCIE_RXN1: 1.109 JP3.31 | length 3.2
  Top Layer w0.203: 1.109@46.942,77.135 46.942,80.254 JP3.31@46.987,80.3
PCIE_RXN2: 1.100 J1.25 JP4.5 | length 93.6
  Top Layer w0.203: v1(-13.688,58.989) -13.688,59.853 -13.178,60.362 J1.25@-11.583,60.362 ; v1(52.959,67.375) 1.100@54.162,67.375 JP4.5@61.821,67.375
  Bottom Layer w0.203: v1(-13.688,58.989) -13.612,59.065 -8.039,59.065 -3.249,63.856 -3.249,72.187 -0.114,75.321 5.25,75.321 6.495,74.077 43.95,74.077 50.198,67.828 52.506,67.828 v1(52.959,67.375)
PCIE_RXP0: 1.113 JP3.27 | length 3.2
  Top Layer w0.203: 1.113@41.862,77.135 41.862,80.254 JP3.27@41.907,80.3
PCIE_RXP1: 1.108 JP3.32 | length 6.2
  Top Layer w0.203: JP3.32@46.987,82.84 48.212,81.615 1.108@48.212,77.135
PCIE_RXP2: 1.101 J1.23 JP4.4 | length 94.5
  Top Layer w0.203: v1(-13.104,59.599) -13.068,59.562 J1.23@-11.583,59.562 ; v1(52.959,68.645) 1.101@54.162,68.645 63.091,68.645 JP4.4@64.361,69.915
  Bottom Layer w0.203: v1(-13.104,59.599) -12.926,59.421 -8.186,59.421 -3.604,64.003 -3.604,72.334 -0.262,75.677 5.398,75.677 6.617,74.458 44.071,74.458 50.345,68.184 52.498,68.184 v1(52.959,68.645)
PCIE_TXN0: 1.115 JP3.25 | length 3.2
  Top Layer w0.203: 1.115@39.322,77.135 39.322,80.254 JP3.25@39.367,80.3
PCIE_TXN1: 1.107 JP3.33 | length 3.2
  Top Layer w0.203: 1.107@49.482,77.135 49.482,80.254 JP3.33@49.527,80.3
PCIE_TXN2: 1.98 J1.33 JP4.7 | length 101
  Top Layer w0.203: v1(-14.095,57.44) -14.095,57.744 -14.907,58.557 -14.907,62.266 -13.815,63.358 -11.788,63.358 J1.33@-11.583,63.562 ; v1(52.959,64.835) 1.98@54.162,64.835 JP4.7@61.821,64.835
  Bottom Layer w0.203: v1(-14.095,57.44) -13.891,57.643 -8.456,57.643 -2.538,63.561 -2.538,71.892 0.18,74.61 4.956,74.61 6.2,73.365 41.918,73.365 50.02,65.263 52.531,65.263 v1(52.959,64.835)
PCIE_TXP0: 1.116 JP3.26 | length 6.2
  Top Layer w0.203: 1.116@38.052,77.135 38.052,81.524 JP3.26@39.367,82.84
PCIE_TXP1: 1.106 JP3.34 | length 6.2
  Top Layer w0.203: JP3.34@49.527,82.84 50.752,81.615 1.106@50.752,77.135
PCIE_TXP2: 1.99 J1.31 JP4.6 | length 102.6
  Top Layer w0.203: v1(-13.663,58.176) -14.023,58.176 -14.552,58.704 -14.552,62.118 -13.668,63.002 -11.823,63.002 J1.31@-11.583,62.762 ; v1(52.959,66.105) 1.99@54.162,66.105 63.091,66.105 JP4.6@64.361,67.375
  Bottom Layer w0.203: v1(-13.663,58.176) -13.485,57.998 -8.603,57.998 -2.893,63.708 -2.893,72.039 0.033,74.966 5.103,74.966 6.348,73.721 42.065,73.721 50.167,65.618 52.472,65.618 v1(52.959,66.105)
PERST_N: 1.105 J1.22 | length 87.4
  Top Layer w0.203: J1.22@-19.783,59.162 -17.401,59.162 v1(-17.371,59.192) ; v1(52.959,73.725) 1.105@54.162,73.725
  Bottom Layer w0.203: v1(-17.371,59.192) -16.762,59.192 -15.009,60.945 -8.171,60.945 -4.722,64.394 -4.722,72.761 -0.714,76.769 5.85,76.769 7.069,75.55 48.664,75.55 50.488,73.725 v1(52.959,73.725)
PORST_N: 1.95 JP4.10 | length 10.7
  Top Layer w0.203: 1.95@54.162,61.025 63.091,61.025 JP4.10@64.361,62.295
RTS2_N: 1.14 JP2.3 | length 8.6
  Top Layer w0.203: JP2.3@-2.466,52.512 2.237,57.215 1.14@4.162,57.215
RTS3_N: 1.16 JP2.1 | length 8.6
  Top Layer w0.203: JP2.1@-2.466,49.972 2.237,54.675 1.16@4.162,54.675
RX0_CH340: JP1.1 JP1.5 JP1.9 U5.9 | length 62.8
  Top Layer w0.2: U5.9@-61.054,36.109 -61.054,34.638 -60.554,34.138 -57.277,34.138 -56.439,34.976 -56.439,42.316 -55.844,42.911 -29.957,42.911 -29.058,42.012 -29.058,40.64 -25.334,36.916 JP1.1@-23.421,36.916 -24.717,35.621 -24.717,33.132 JP1.5@-23.421,31.836 -24.717,30.541 -24.717,28.052 JP1.9@-23.421,26.756
RXD1: 1.93 JP1.4 JP4.12 | length 140.9
  Top Layer w0.203: JP1.4@-20.881,34.376 -19.761,35.496 -19.761,43.663 -20.403,44.305 -22.106,44.305 -22.637,44.835 -22.637,53.559 -20.557,55.639 -7.039,55.639 -3.102,59.576 -3.102,72.819 -0.114,75.807 5.449,75.807 7.367,73.889 49.231,73.889 50.241,72.878 50.241,60.185 51.941,58.485 1.93@54.162,58.485 63.091,58.485 JP4.12@64.361,59.755
RXD2: 1.11 JP1.8 | length 50.6
  Top Layer w0.203: JP1.8@-20.881,29.296 -18.796,31.382 -18.796,44.834 -17.732,45.898 -17.732,53.598 -16.497,54.833 -6.573,54.833 -0.381,61.025 1.11@4.162,61.025
RXD3: 1.13 JP1.12 | length 53.9
  Top Layer w0.203: JP1.12@-20.881,24.216 -20.881,24.661 -17.882,27.661 -17.882,44.484 -16.925,45.441 -16.925,53.264 -16.163,54.027 -6.225,54.027 -1.766,58.485 1.13@4.162,58.485
SSUSB_RXN: 1.23 J4.5 | length 66.4
  Top Layer w0.305: J4.5@-25.218,-0.573 -26.038,0.247 -26.038,17.734 -24.585,19.187 -14.704,19.187 -12.317,21.575 -12.317,31.22 2.651,46.187 3.76,46.187 1.23@4.162,45.785
SSUSB_RXP: 1.22 J4.6 | length 67.1
  Top Layer w0.305: J4.6@-27.218,-0.573 -27.218,-0.488 -26.495,0.235 -26.495,17.924 -24.759,19.66 -14.918,19.66 -12.774,21.803 -12.774,31.41 2.461,46.645 3.751,46.645 1.22@4.162,47.055
SSUSB_TXN: 1.21 J4.8 | length 73.7
  Top Layer w0.305: J4.8@-31.218,-0.573 -32.053,0.263 -32.053,3.21 -32.057,3.214 -32.057,5.039 -31.6,5.497 -28.604,5.497 -27.674,6.427 -27.674,18.478 -25.781,20.371 -15.642,20.371 -13.561,22.452 -13.561,33.188 1.927,48.677 3.81,48.677 1.21@4.162,48.325
SSUSB_TXP: 1.20 J4.9 | length 74.5
  Top Layer w0.305: J4.9@-33.218,-0.573 -33.218,-0.449 -32.558,0.211 -32.558,3.001 -32.562,3.005 -32.562,5.248 -31.809,6.001 -28.813,6.001 -28.179,6.636 -28.179,18.687 -25.99,20.876 -15.851,20.876 -14.066,22.661 -14.066,33.397 1.718,49.181 3.748,49.181 1.20@4.162,49.595
TX0_CH340: JP1.3 JP1.7 JP1.11 R39.2 | length 58.5
  Top Layer w0.2: R39.2@-58.064,39.511 -58.064,41.859 -56.53,43.393 -29.576,43.393 -28.575,42.393 -28.575,40.843 -25.857,38.125 -22.454,38.125 -22.075,37.747 -22.075,35.723 JP1.3@-23.421,34.376 -22.126,33.081 -22.126,30.592 JP1.7@-23.421,29.296 -22.126,28.001 -22.126,25.512 JP1.11@-23.421,24.216
TXD1: 1.94 JP1.2 JP4.11 | length 135.4
  Top Layer w0.203: JP1.2@-20.881,36.916 -20.881,37.031 -20.164,37.748 -20.164,43.496 -20.57,43.901 -22.273,43.901 -23.04,44.668 -23.04,53.726 -20.724,56.043 -7.206,56.043 -3.505,59.743 -3.505,72.986 -0.281,76.21 5.616,76.21 7.534,74.292 49.406,74.292 50.709,72.989 50.709,60.429 51.382,59.755 1.94@54.162,59.755 JP4.11@61.821,59.755
TXD2: 1.10 JP1.6 | length 48.9
  Top Layer w0.203: JP1.6@-20.881,31.836 -19.253,33.465 -19.253,45.034 -18.135,46.152 -18.135,53.765 -16.664,55.236 -6.872,55.236 0.187,62.295 1.10@4.162,62.295
TXD3: 1.12 JP1.10 | length 52.3
  Top Layer w0.203: JP1.10@-20.881,26.756 -18.339,29.299 -18.339,44.634 -17.329,45.644 -17.329,53.431 -16.33,54.43 -6.392,54.43 -1.066,59.755 1.12@4.162,59.755
USB_DM_P0: 1.26 J4.2 | length 69.8
  Top Layer w0.305: J4.2@-30.218,-2.073 -28.745,-3.546 -24.883,-3.546 -22.431,-1.094 -22.431,17.55 -21.782,18.199 -13.824,18.199 -11.047,20.977 -11.047,28.934 2.397,42.377 3.76,42.377 1.26@4.162,41.975
USB_DM_P1: 1.18 J3.2 R48.2 | length 137.8
  Top Layer w0.305: J3.2@-44.707,-3.502 -43.64,-2.435 -43.64,1.407 -44.478,2.245 -44.478,2.774 -38.616,8.636 -36.148,8.636 -36.118,8.606 -29.52,8.606 -28.94,9.186 -28.94,19.549 -26.718,21.771 -16.769,21.771 -14.732,23.807 -14.732,35.017 2.763,52.512 3.785,52.512 1.18@4.162,52.135 v1@7.569,52.135 ; -23.495,39.116 R48.2@-23.495,39.813
  Bottom Layer w0.305: v1(-23.495,38.837) -23.038,39.294 5.41,39.294 6.299,40.183 6.299,52.474 6.708,52.883 7.188,52.883 7.569,52.502 v1@7.569,52.121
  other v1: 7.584,52.135
USB_DP_P0: 1.25 J4.3 | length 67.7
  Top Layer w0.305: J4.3@-28.218,-2.073 -28.218,-2.407 -27.536,-3.089 -25.072,-3.089 -22.888,-0.904 -22.888,17.739 -21.971,18.656 -14.067,18.656 -11.504,21.219 -11.504,29.124 2.207,42.835 3.751,42.835 1.25@4.162,43.245
USB_DP_P1: 1.17 J3.3 R49.2 | length 138
  Top Layer w0.305: J3.3@-44.707,-1.502 -45.759,-0.449 -45.759,2.207 -38.822,9.144 -35.942,9.144 -35.909,9.111 -29.729,9.111 -29.461,9.378 -29.461,19.764 -26.95,22.275 -16.978,22.275 -15.262,23.991 -15.262,35.268 2.487,53.017 3.773,53.017 1.17@4.162,53.405 v1(7.584,53.405) ; v1@-25.044,39.04 R49.2@-25.044,39.813
  Bottom Layer w0.305: v1(-25.044,38.837) -24.536,38.837 -23.571,39.802 5.156,39.802 5.794,40.44 5.794,52.683 6.517,53.405 v1(7.584,53.405)
WDT_RST_N: 1.112 Default1.1 | length 184
  Top Layer w0.254: v1@-65.736,28.215 v1(-65.759,28.215) -66.502,28.215 -68.882,25.834 -68.882,2.03 -63.928,-2.925 Default1.1@-63.928,-12.471 ; 1.112@43.132,77.135 v1(43.132,78.638)
  Bottom Layer w0.254: v1(-65.759,28.215) -65.301,28.673 -65.301,38.471 -27.409,76.363 -1.695,76.363 -0.882,77.175 6.018,77.175 7.238,75.956 42.954,75.956 43.132,76.134 v1(43.132,78.638)
pads on no net: J1.1 J1.3 J1.5 J1.6 J1.7 J1.8 J1.10 J1.12 J1.14 J1.16 J1.17 J1.19 J1.20 J1.28 J1.30 J1.32 J1.45 J1.51 J1.53 J1.54 J1.61 J1.62 J1.67 J1.68 P1.33 P1.34 U4.2 U5.4 U5.5 U5.6 USB1.0 USB1.4 W1.9

## Polygon pours and split planes (outlines as drawn)
GND on Top Layer "Top Layer-No Net" (solid, remove dead copper, pour order 12): -14.608,-15.865 -14.608,-9.365 -15.608,-9.365 -16.358,-9.365 -16.358,-4.181 -16.358,-1.115 -15.358,-1.115 -12.798,-1.115 -12.798,-2.468 -12.798,-10.496 -6.35,-10.496 61.142,-10.496 61.142,-6.365 61.142,-1.115 62.441,-1.115 67.892,-1.115 67.892,-1.365 67.892,-15.865 65.892,-15.865 -14.608,-15.865 -14.608,-15.789
GND on Top Layer "Top Layer-No Net" (solid, remove dead copper, pour order 14): -13.379,-15.88 -13.379,-0.561 -12.379,-0.561 -12.379,6.466 -12.379,19.65 -5.848,19.65 67.892,19.65 67.892,18.125 67.892,84.135 57.389,84.135 -72.144,84.135 -72.144,74.884 -72.144,-15.88 -71.144,-15.88
5VD_E_G on Bottom Layer "Top Layer-No Net" (solid, remove dead copper, pour order 9): -21.724,69.911 -12.289,69.911 -7.924,65.579 -7.823,65.48 -7.823,62.318 -7.823,62.019 -8.2,61.646 -10.558,61.646 -13.87,64.932 -15.777,66.824 -20.043,66.824 -21.398,66.824 -21.774,67.197 -22.075,67.496 -22.075,68.84 -22.075,69.587 -21.749,69.911
GND on Bottom Layer "Top Layer-No Net" (solid, remove dead copper, pour order 11): -14.608,-15.865 -14.608,-9.365 -15.608,-9.365 -16.358,-9.365 -16.358,-4.181 -16.358,-1.115 -15.358,-1.115 -12.798,-1.115 -12.798,-2.468 -12.798,-10.496 -6.35,-10.496 61.142,-10.496 61.142,-6.365 61.142,-1.115 62.441,-1.115 67.892,-1.115 67.892,-1.365 67.892,-15.865 65.892,-15.865 -14.608,-15.865 -14.608,-15.789
GND on Bottom Layer "Top Layer-No Net" (solid, remove dead copper, pour order 13): -13.358,-15.865 -13.358,-0.549 -12.358,-0.549 -12.358,6.477 -12.358,19.619 -6.083,19.619 67.892,19.619 67.892,18.135 67.892,84.135 57.392,84.135 -72.108,84.135 -72.108,74.885 -72.108,-15.865 -71.108,-15.865

## Keep-outs
Keep-Out Layer:
  the board outline again, w0.203

## Other copper
Top Layer:
  rectangle net 5VD_E_G: -9.858,61.554 -7.699,68.412
  rectangle net 5VD: -7.191,65.923 -4.905,70.698
  rectangle net 3.3V: 1.092,69.393 5.207,74.193
  rectangle net LDO-3.3V: -61.722,38.252 -59.868,39.929
  pour cut-out: -36.297,32.918 -31.318,32.918 -31.013,32.614 -31.013,27.407 -30.963,27.356 -36.017,27.356 -36.347,27.686 -36.297,27.737
  pour cut-out: -58.496,28.118 -53.518,28.118 -53.213,27.813 -53.213,22.606 -53.162,22.555 -58.217,22.555 -58.547,22.885 -58.496,22.936
  pour cut-out: 47.501,22.05 60.679,22.05 60.679,21.783 47.501,21.783 47.501,22.05
  region net 5VD: -5.092,69.04 -7.53,69.04 -7.53,70.691 -5.092,70.691 -5.092,69.04
  pour cut-out: 47.626,20.394 49.923,20.394 49.923,20.537 47.626,20.537 47.626,20.394
  pour cut-out: 50.444,20.338 60.81,20.338 60.81,20.539 50.444,20.539 50.444,20.338
  pour cut-out: 46.648,20.335 47.518,20.335 47.518,20.452 46.648,20.452 46.648,20.335

## Silkscreen, mask and mechanical layers (free items; w line width, h text height)
Top Overlay:
  lines w0.15: 7.617,80.063 7.617,78.387 27.965,78.387 27.965,81.407 ; 12.624,78.387 12.624,83.668 15.24,83.668 15.24,79.375 20.371,79.375 20.371,81.432 22.708,81.432 22.835,81.559 22.835,83.591 23.012,83.769 27.915,83.769 ; 27.965,81.204 27.965,83.82 ; 33.071,79.03 33.071,81.483 35.509,81.483 ; 35.509,79.055 35.509,81.483 ; 35.509,83.82 35.509,81.483 ; 43.18,79.03 43.18,83.82 ; 55.626,56.032 55.626,58.522 ; 55.651,60.985 55.626,61.011 ; 55.677,55.982 60.576,55.982 63.068,55.982 63.068,58.471 ; 58.953,55.982 58.953,38.151 60.526,38.151 ; 58.979,63.932 58.979,71.222 ; 60.551,38.151 65.631,38.151 ; 60.551,71.196 63.043,71.196 63.119,71.196 63.119,73.7 ; 60.551,71.222 58.979,71.222 ; 60.551,73.725 55.967,73.725 55.967,71.222 58.979,71.222 ; 60.576,61.011 55.626,61.011 ; 60.602,60.985 63.119,60.985 65.606,60.985 ; 63.144,61.011 63.144,63.221 65.606,63.221 ; 65.606,58.471 65.529,58.471 60.551,58.471 55.677,58.471 55.626,58.522 ; 65.606,66.065 62.865,66.065 62.865,63.856 60.576,63.856 55.626,63.856 55.626,61.011 ; 65.631,40.056 67.589,40.056 67.589,48.946 65.631,48.946 ; 65.631,43.256 63.144,43.256 63.144,45.72 65.631,45.72 ; 65.631,59.512 67.615,59.512 67.615,64.567 65.631,64.567 ; 55.626,58.522 55.626,61.011
  text "2" at 7.352,82.588 h1.2 r90
  text "2" at 7.352,82.588 h1.2 r90
  text "34" at 51.802,82.309 h1.2 r90
  text "CS" at 13.335,81.229 h1.1
  text "SI" at 23.673,81.229 h1.1
  text "HOLD" at 25.248,81.229 h1.1
  text "JTAG" at 30.455,81.229 h1.1
  text "PCIE0" at 38.049,81.229 h1.1
  text "PCIE1" at 45.695,81.229 h1.1
  text "NAND" at 4.826,81.178 h1.1
  text "1" at 7.352,80.023 h1.2 r90
  text "1" at 7.352,80.023 h1.2 r90
  text "33" at 51.802,79.743 h1.2 r90
  text "HLK-7621-ALL-KIT-V2.2" at -62.055,79.004 h2
  text "GND" at 25.603,78.638 h1.1
  text "SCK" at 12.954,78.613 h1.1
  text "SO" at 20.879,78.588 h1.1
  text "WP" at 23.368,78.588 h1.1
  text "FLASH" at 16.408,78.537 h1.1
  text "JTAG" at 29.413,78.181 h1.1
  text "GND" at 33.274,78.181 h1.1
  text "PCIE1" at 45.669,78.181 h1.1
  text "PCIE0" at 38.1,78.156 h1.1
  text "+" at -19.937,77.861 h1 r90
  text "Status_LED" at 55.169,77.445 h1
  text "1" at 2.365,74.651 h1.2
  text "1" at 61.544,73.99 h1.2
  text "2" at 64.11,73.99 h1.2
  text "GPIO0" at 56.236,72.136 h1.5
  text "PCIE2" at 60.198,65.786 h1.5 r90
  text "I2C" at 57.175,61.9 h1.5
  text "PORST" at 67.031,59.919 h1.5 r90
  text "J0" at -66.437,59.258 h0.8
  text "UART0" at 56.007,59.233 h1.5
  text "GND" at 56.667,56.794 h1.5
  text "CTS3_N" at -4.801,53.899 h1 r90
  text "RTS2_N" at -2.184,53.899 h1 r90
  text "GE2" at 60.173,47.092 h1.5 r90
  text "CTS2_N" at -4.699,45.187 h1 r90
  text "RTS3_N" at -2.083,45.187 h1 r90
  text "DM" at -22.073,41.783 h0.8
  text "DP" at -27.737,41.758 h0.8
  text "ESW_DBG_B" at 67.107,40.462 h1.5 r90
  text "27" at 61.265,37.236 h1.2
  text "28" at 63.906,37.186 h1.2
  text "3.3V" at -29.947,37.084 h2
  text "TX0" at -18.971,36.459 h1.02
  text "RX0" at -18.971,33.919 h1.02
  text "5V" at -54.331,32.614 h2
  text "TX2" at -18.971,31.379 h1.02
  text "RX2" at -18.971,28.839 h1.02
  text "TX3" at -18.971,26.299 h1.02
  text "RX3" at -18.971,23.759 h1.02
  text "P4" at 53.95,22.073 h1.5
  text "P0" at -4.267,21.92 h1.5
  text "P1" at 7.95,21.844 h1.5
  text "P2" at 24.054,21.844 h1.5
  text "P3" at 36.347,21.844 h1.5
  text "12V" at -58.875,-2.2 h2
Bottom Overlay:
  lines w0.2: 12.598,77.775 12.598,83.947 15.291,83.947 15.291,81.001 15.291,78.994 20.015,78.994 20.32,79.299 20.32,80.416 20.32,81.534 21.92,81.534 22.377,81.991 22.809,82.423 22.809,83.642 23.089,83.922 27.915,83.922 27.915,82.353 28.473,81.794 28.473,81.28 28.067,80.874 28.067,79.451 28.067,77.8 28.042,77.775 15.291,77.775 12.598,77.775 ; 63.144,61.062 63.144,63.602 65.634,63.602 65.634,64.694 67.615,64.694 67.615,59.639 65.634,59.639 65.634,61.062 63.144,61.062
  text "CS" at 14.605,81.28 h1.1
  text "HOLD" at 28.067,81.229 h1.1
  text "MOSI" at 25.095,81.204 h1.1
  text "GND" at 27.635,78.207 h1.1
  text "SCK" at 14.884,78.156 h1.1
  text "MISO" at 22.736,78.156 h1.1
  text "WP" at 24.892,78.156 h1.1
  text "FLASH" at 22.403,76.2 h2
  text "PORST" at 66.892,64.313 h1.5 r90